# Altium PCB SparkGapPcb.PcbDoc
Units mil, origin at the board's own origin, x right, y up, seen from the top; angles counter-clockwise.
Board outline 2650 x 3200 mil, 2 copper layers (Top Layer, Bottom Layer); 35 components, 16 nets, 82 pads, 0 vias.
Unrouted connection lines stored in the file: 63.
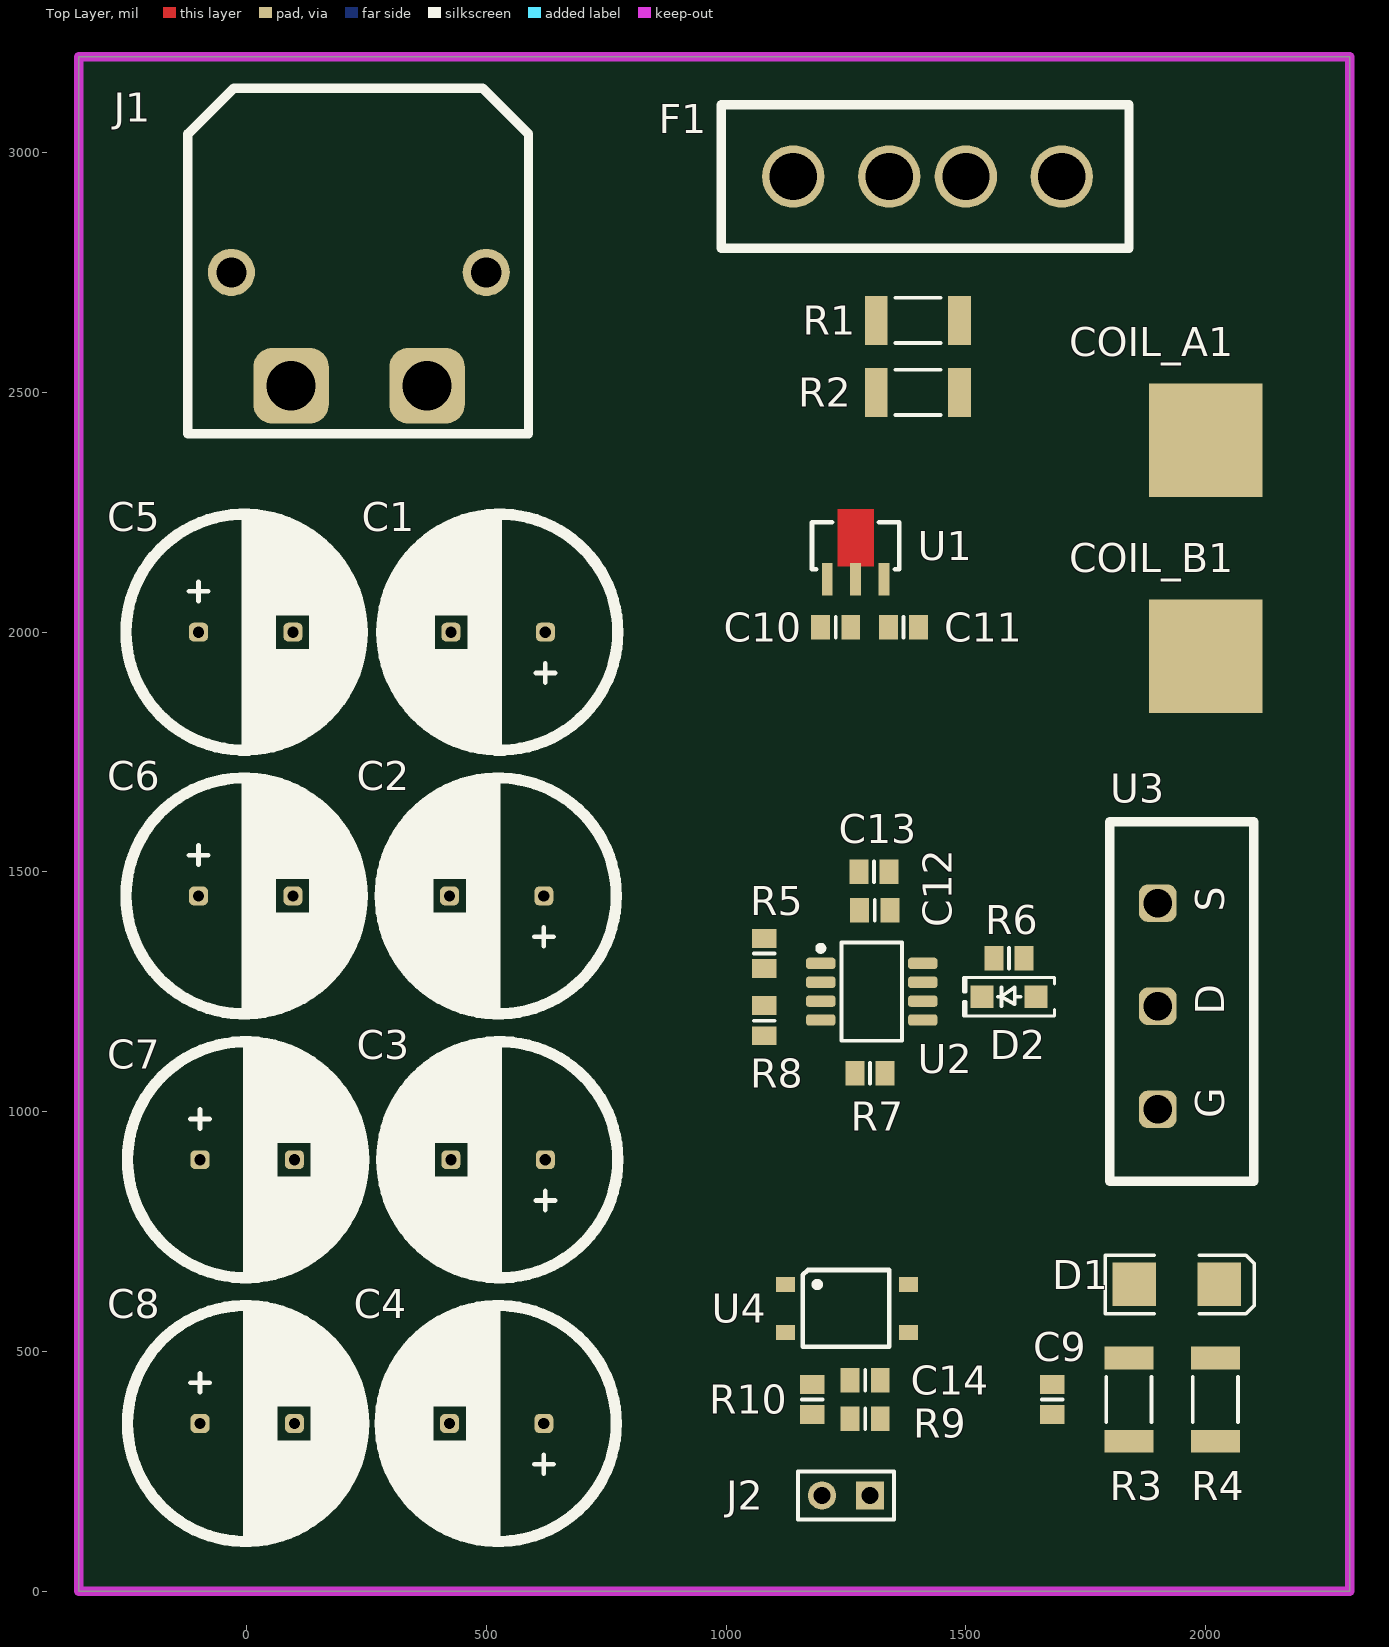
[diagram p0: Top Layer view]
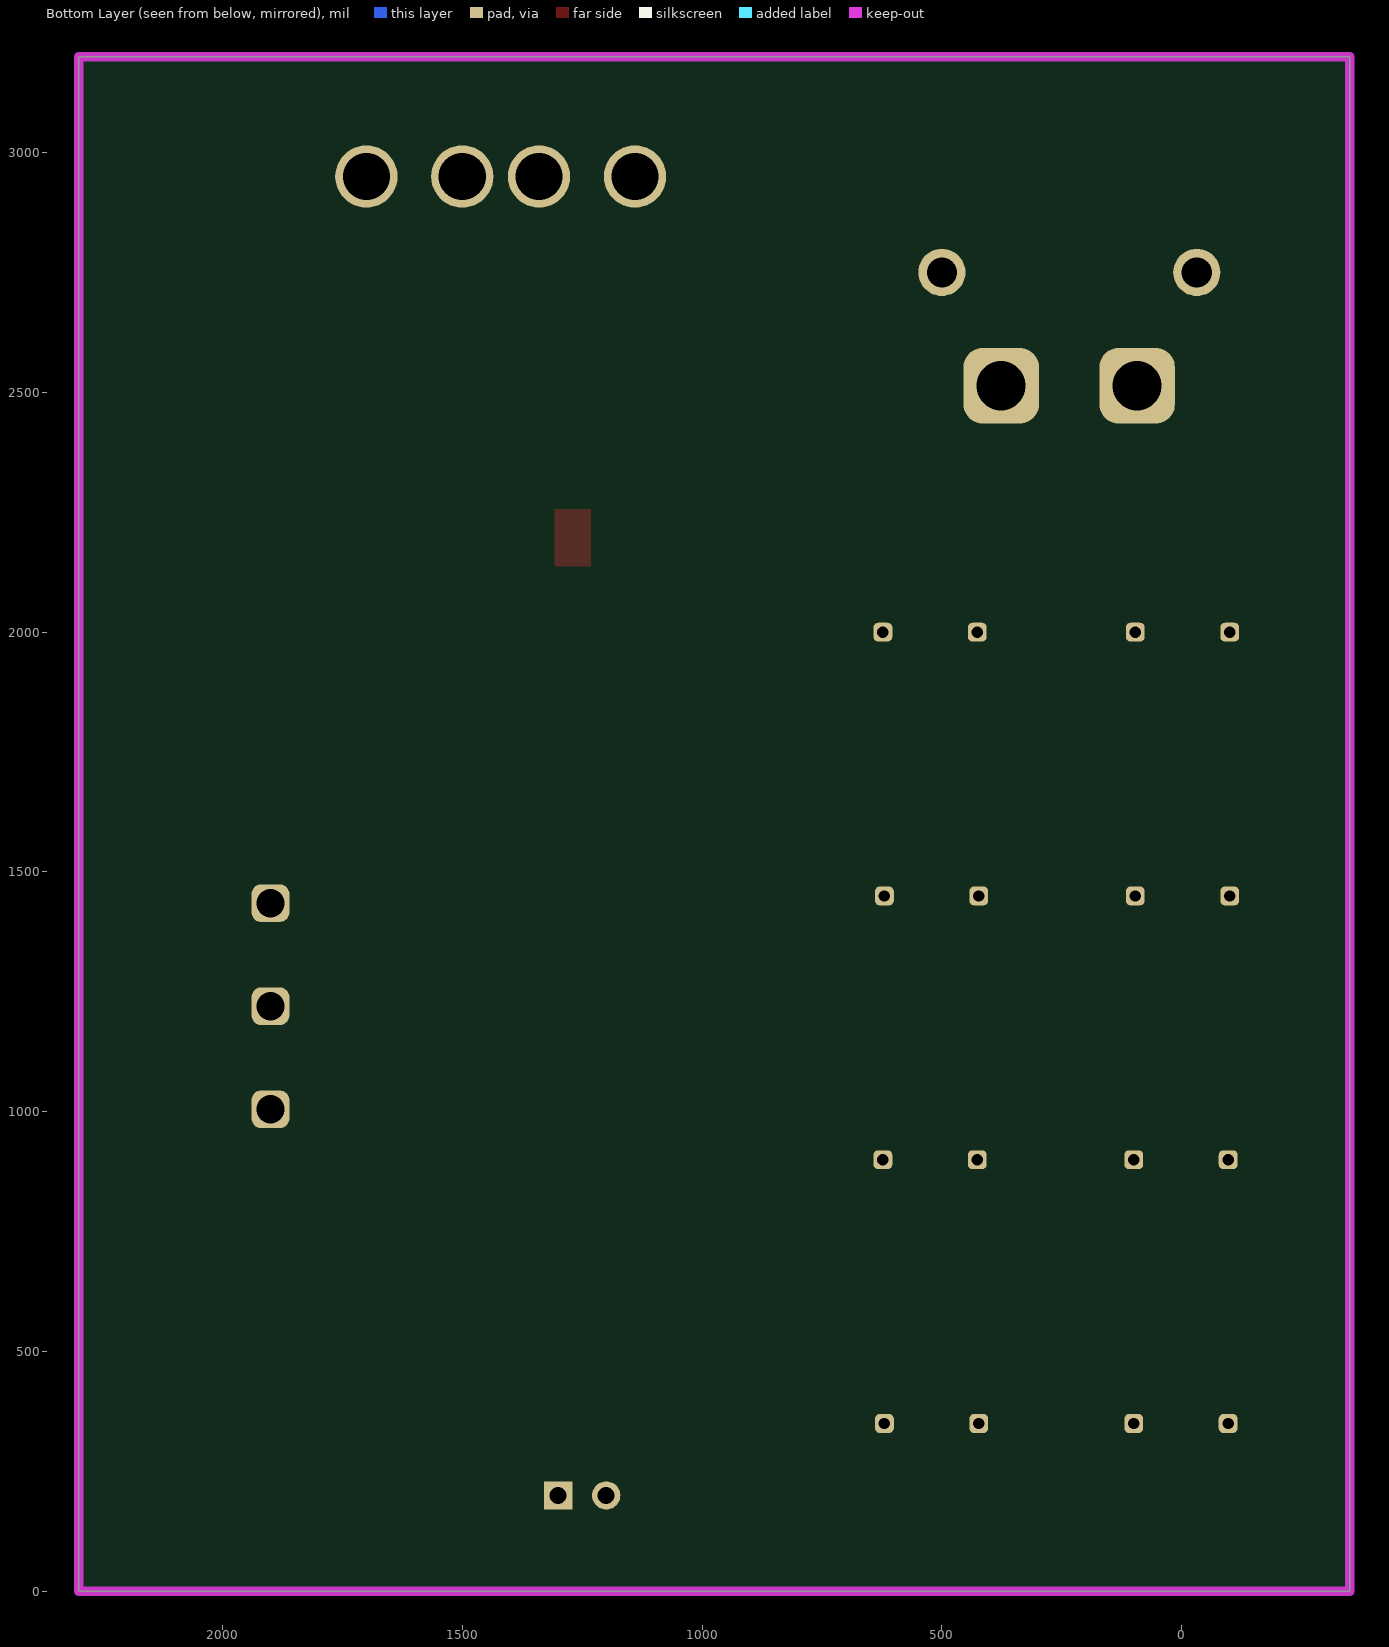
[diagram p1: Bottom Layer view, seen from below]

## Layer stack, top to bottom
Top Solder: solder mask 0.4, Solder Resist, Dk 3.5
Top Layer: signal copper 1.4
Dielectric 1: dielectric 12.6, FR-4, Dk 4.8
Bottom Layer: signal copper 1.4
Bottom Solder: solder mask 0.4, Solder Resist, Dk 3.5

## Board outline
-350,0 -350,3200 2300,3200 2300,0

## Design rules (kind name [scope] priority, off if disabled: settings)
Clearance [All] p1: gap=10 ignorepadtopadclearanceinfootprint=FALSE except(0: Arc-Hole Track-Hole SMDPad-Hole THPad-Hole Via-Hole Fill-Hole Poly-Hole Region-Hole Text-Hole)
PolygonConnect [All] p1: connectstyle=Relief reliefconductorwidth=10 reliefentries=4 polygonreliefangle="90 Angle" airgapwidth=10
RoutingVias [All] p1: holewidth=28 width=50 viastyle="Through Hole" minholewidth=28 minwidth=50 maxholewidth=28 maxwidth=50
SolderMaskExpansion [All] p1: expansion=4 istentingtop=FALSE
Width [All] p1: maxlimit=10 minlimit=10 preferedwidth=10
30 further rules are at their usual default settings.

## Classes and differential pairs
component class SparkGapSchematic: C1 C2 C3 C4 C9 C11 C12 C13 C14 COIL_A1 COIL_B1 D1 D2 F1 J1 J2 R1 R2 R3 R4 R5 R6 R7 R8 R9 R10 U1 U2 U3 U4

## Components (designator, comment, footprint, x,y, rotation, side; value= is the part's Value field where it differs from the comment)
C1 "Cap" CAP_40MM 623.15,2000 r180 top value=100uF
C2 "Cap" CAP_40MM 620,1450 r180 top value=100uF
C3 "Cap" CAP_40MM 623.15,900 r180 top value=100uF
C4 "Cap" CAP_40MM 620,350 r180 top value=100uF
C5 "Cap" CAP_40mm -100,2000 r0 top value=100uF
C6 "Cap" CAP_40mm -100,1450 r0 top value=100uF
C7 "Cap" CAP_40mm -96.85,900 r0 top value=100uF
C8 "Cap" CAP_40mm -96.85,350 r0 top value=100uF
C9 "Cap" 6-0805_L 1680,400 r270 top value=0.1uF
C10 "Cap" 6-0805_L 1228.5,2010 r0 top value=0.1uF
C11 "Cap" 6-0805_L 1370,2010 r180 top value=0.1uF
C12 "Cap" 6-0805_L 1310,1420 r180 top value=100uF
C13 "Cap" 6-0805_L 1308.5,1500 r180 top value=100uF
C14 "Cap" 6-0805_L 1290,440 r0 top value=0.1uF
COIL_A1 "PAD" PAD 2000,2400 r0 top
COIL_B1 "PAD" PAD 2000,1950 r0 top
D1 "D Schottky" SMB 1940,640 r0 top
D2 "D Schottky" SOD123F 1590,1240 r180 top
F1 "30A" FUSE_HOLDER 1140,2950 r0 top
J1 "XT60PW" XT60PW 93,2513.78 r0 top
J2 "Header 2" HDR1X2 1300,200 r180 top
R1 "Res3" 12Z-2010 1400,2650 r0 top value=0.5
R2 "Res3" 12Z-2010 1400,2500 r0 top value=0.5
R3 "Res3" 12Z-2010 1840,400 r90 top value=0.5
R4 "Res3" 12Z-2010 2020,400 r90 top value=0.5
R5 "Res3" 6-0805_L 1080,1330 r90 top value=10k
R6 "Res3" 6-0805_L 1590,1320 r0 top value=10k
R7 "Res3" 6-0805_L 1300,1080 r180 top value=10k
R8 "Res3" 6-0805_L 1080,1190 r90 top value=5k
R9 "Res3" 6-0805_L 1290,360 r180 top value=1k
R10 "10k" 6-0805_L 1180,400 r270 top
U1 "ZXTR2012Z-7" ZXTR2012Z 1270,2110 r0 top
U2 "UCC27321DR" Gate_Driver_UCC27321DR 1197.4,1309.37 r0 top
U3 "N_CHANNEL" N_CH_SUG90090E 1900,1005.04 r90 top
U4 "LTV-356T" OptoIsolator_LTV-356T-B 1380,640 r270 top

## Footprints (in the part's own frame and the unit in brackets; to place one, negate y for a bottom-side part, rotate by r counter-clockwise, add the part's x,y. Pads: shape width x height; smd on the part's side, far side on the other; paste and mask are expansions set on the pad)
6-0805_L [mm] "Chip Resistor, Body 2.0x1.2mm, IPC High Density"
  rect 1x1.3 smd: 1(-0.8,0) 2(0.8,0)
  silkscreen extent 0,-0.55 0,0.55, body extent -1.07,-0.7 1.07,0.7, height 0.7
12Z-2010 [mm] "Chip Resistor, Body 5.0x2.5mm, IPC High Density"
  rect 1.2x2.6 smd: 1(-2.2,0) 2(2.2,0)
  silkscreen extent -1.2,-1.2 1.2,1.2, body extent -2.58,-1.33 2.58,1.33, height 0.9
CAP_40MM [mm]
  rrect50% 1x1 hole 0.6: 1(5,0) 2(0,0)
  silkscreen extent -3.84,-6.25 10.67,6.25
CAP_40mm [mm]
  rrect50% 1x1 hole 0.6: 1(5,0) 2(0,0)
  silkscreen extent -3.84,-6.25 10.67,6.25
FUSE_HOLDER [mil]
  round 130 hole 98.43: 1(0,0) 1(200,0) 2(360,0) 2(560,0)
  silkscreen extent -150,-150 700,150
Gate_Driver_UCC27321DR [mm]
  rrect50% 1.55x0.6 smd: 1(0,0) 2(0,-1) 3(0,-2) 4(0,-3) 5(5.4,-3) 6(5.4,-2) 7(5.4,-1) 8(5.4,0)
  silkscreen extent -0.14,-4.1 4.3,1.1
HDR1X2 [mm] "Connector; Header; 2 Position"
  rect 1.5x1.5 hole 0.9: 1(0,0)
  round 1.5 hole 0.9: 2(2.54,0)
  silkscreen extent -1.27,-1.27 3.81,1.27
N_CH_SUG90090E [mm]
  rrect50% 2x2 hole 1.5: D(5.46,0) G(0,0) S(10.92,0)
  silkscreen extent -3.81,-5.08 15.24,2.54
OptoIsolator_LTV-356T-B [mm]
  rect 0.8x1 smd: 1(0,-6.5) 2(2.54,-6.5) 3(2.54,0) 4(0,0)
  silkscreen extent -0.76,-5.59 3.3,-1.02
PAD [mm]
  rect 6x6 smd: PAD(0,0)
SMB [mm] "DO-214-AA/SMB; 2 C-Bend Leads; Body 5.3 x 3.6 mm, inc. leads (LxW)"
  rect 2.3x2.3 smd: 1(-2.25,0) 2(2.25,0)
  silkscreen extent -3.8,-1.55 4.1,1.55
SOD123F [mm] "SODFL, 2-Leads, Body 1.60x3.50mm, IPC Medium Density"
  rect 1.2x1.2 smd: 1(-1.43,0) 2(1.43,0)
  silkscreen extent -2.41,-1.02 2.41,1.02, body extent -1.75,-0.8 1.75,0.8, height 1.1
XT60PW [mm]
  rrect50% 4x4 hole 2.6: +(7.2,0) -(0,0)
  round 2.5 hole 1.6: SN(-3.162,6) SN(10.338,6)
  silkscreen extent -5.46,-2.54 12.57,15.75
ZXTR2012Z [mm]
  rect 0.58x1.73 smd: GND(-1.5,0) VIN(0,0) VOUT(1.5,0)
  Top Layer region: 0.967,0.685 0.967,3.715 -0.967,3.715 -0.967,0.685
  silkscreen extent -2.31,0.53 2.31,3.02

## Part data
C1 C2 C3 C4 C5 C6 C7 C8 C9 C10 C11 C12 C13 C14: "Capacitor", LatestRevisionDate=17-Jul-2002, LatestRevisionNote="Re-released for DXP Platform.", PackageDescription="Radial Cap, Thru-Hole; 2 Leads; 0.3 in Pin Spacing", PackageReference=RAD-0.3, Published=8-Jun-2000, Publisher="Altium Limited"
D1 D2: "Schottky Diode", Code_JEDEC=DO-214-AA, LatestRevisionDate=17-Jul-2002, LatestRevisionNote="Re-released for DXP Platform.", PackageDescription="DO-214-AA/SMB; 2 C-Bend Leads; Body 5.3 x 3.6 mm, inc. leads (LxW)", PackageReference=SMB, Published=8-Jun-2000, Publisher="Altium Limited"
F1: library part "Fuse 2", "Fuse", LatestRevisionDate=17-Jul-2002, LatestRevisionNote="Re-released for DXP Platform.", PackageDescription="Thru-Hole; 2 Leads", PackageReference=PIN-W2/E2.8, Published=8-Jun-2000, Publisher="Altium Limited"
J2: "Header, 2-Pin", LatestRevisionDate=17-Jul-2002, LatestRevisionNote="Re-released for DXP Platform.", Publisher="Altium Limited"
R1 R2 R3 R4 R5 R6 R7 R8 R9: "Resistor", LatestRevisionDate=29-May-2009, LatestRevisionNote="IPC-7351 Footprint Added.", PackageDescription="Chip Resistor", PackageReference=J1-0603, Published=8-Jun-2000, Publisher="Altium Limited"
R10: library part Res3, "Resistor", LatestRevisionDate=29-May-2009, LatestRevisionNote="IPC-7351 Footprint Added.", PackageDescription="Chip Resistor", PackageReference=J1-0603, Published=8-Jun-2000, Publisher="Altium Limited"

## Nets (pads, with @x,y where several pads share a name; then routed paths per layer and width w, separated by ;. In a path a pad name is that pad's centre, name@x,y a point inside that pad or via, vN(x,y) a via of type N, cw(c..) or ccw(c..) an arc to the next point about the centre after c; other vN are vias at no path point)
12V: C11.2 C12.2 C13.2 R7.1 U1.VOUT U2.1
24V: C10.2 F1.1 J1.+ R5.2 U1.VIN
Coil_A: C1.2 C2.2 C3.2 C4.2 C5.2 C6.2 C7.2 C8.2 C9.2 COIL_A1.PAD R1.1 R2.1 R3.1 R4.1
Coil_B: COIL_B1.PAD D1.1 U3.S
Enable: J2.1 R9.2
GND: C1.1 C2.1 C3.1 C4.1 C5.1 C6.1 C7.1 C8.1 C10.1 C11.1 C12.1 C13.1 J1.- U1.GND U2.4 U2.5 U3.D U4.3
NetC9_1: C9.1 D1.2 R3.2 R4.2
NetC14_1: C14.1 R10.1 U4.1
NetC14_2: C14.2 R9.1
NetD2_1: D2.1 R6.2 U3.G
NetD2_2: D2.2 R6.1 U2.7 U2.8
NetF1_2: F1.2 R1.2 R2.2
NetR5_1: R5.1 R8.2 U2.2
NetR7_2: R7.2 U2.3
NetR8_1: R8.1 U4.4
SGND: J2.2 R10.2 U4.2
pads on no net: J1.SN U2.6

## Keep-outs
Keep-Out Layer:
  the board outline again, w19.68

## Text inside footprints (layer, text, board x,y; h text height)
U3: Top Overlay "G" at 2038.19,986.85 h60 r90; Top Overlay "D" at 2038.19,1201.81 h60 r90; Top Overlay "S" at 2038.19,1416.77 h60 r90